# EAGLE board turnemoff (EAGLE 5.11)
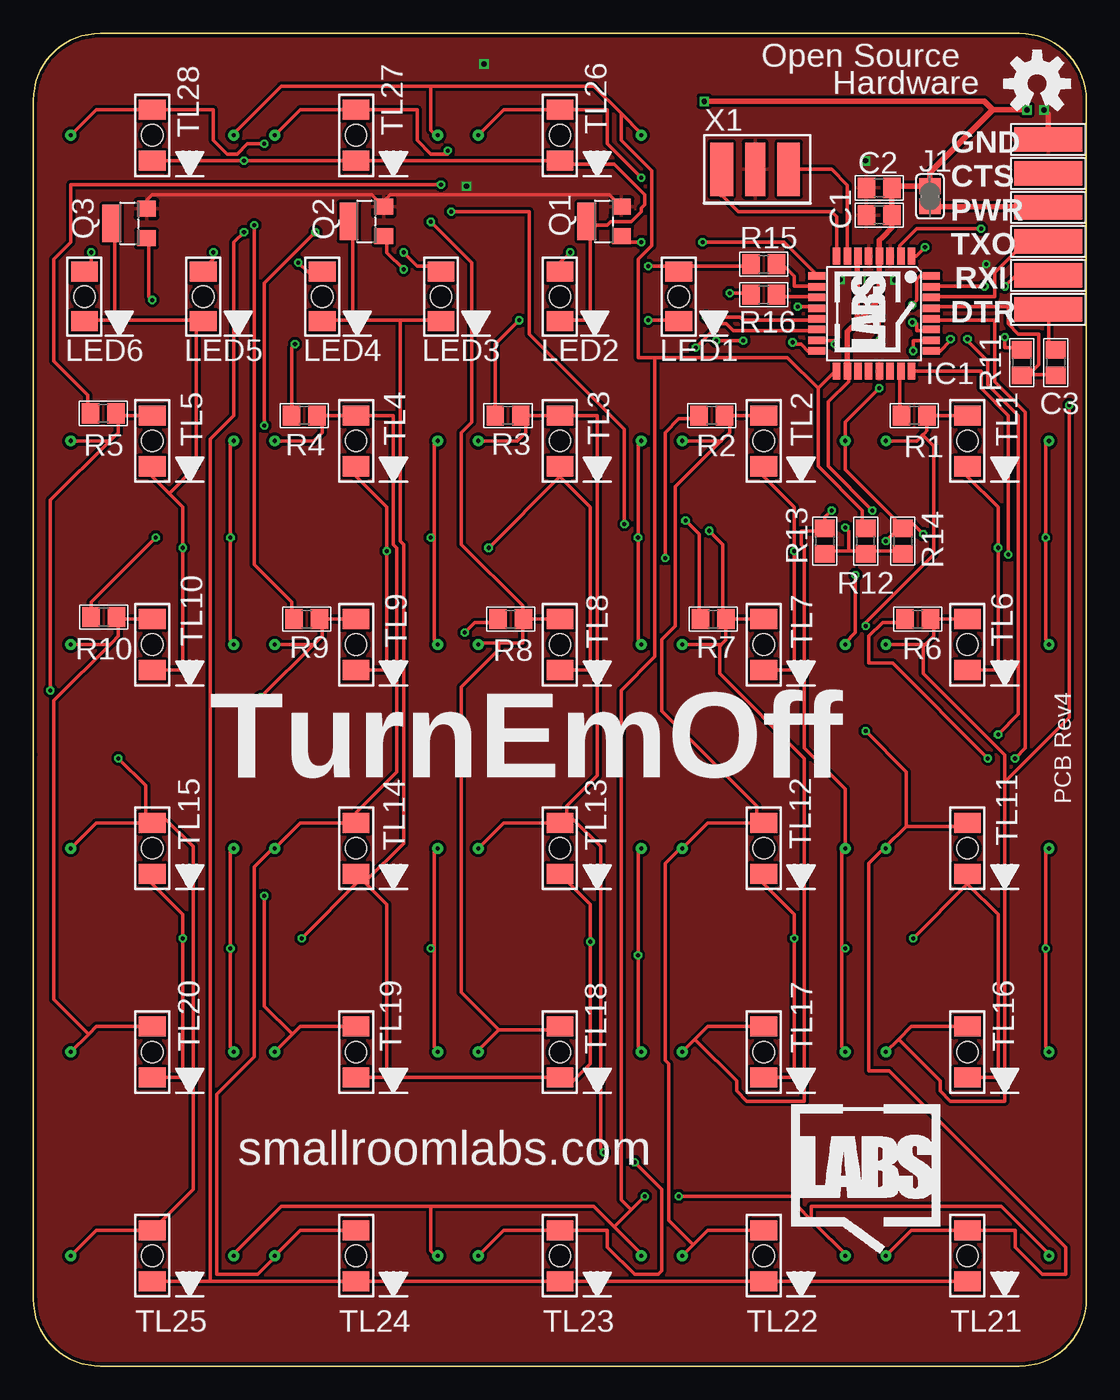
[diagram p0: board, top side]
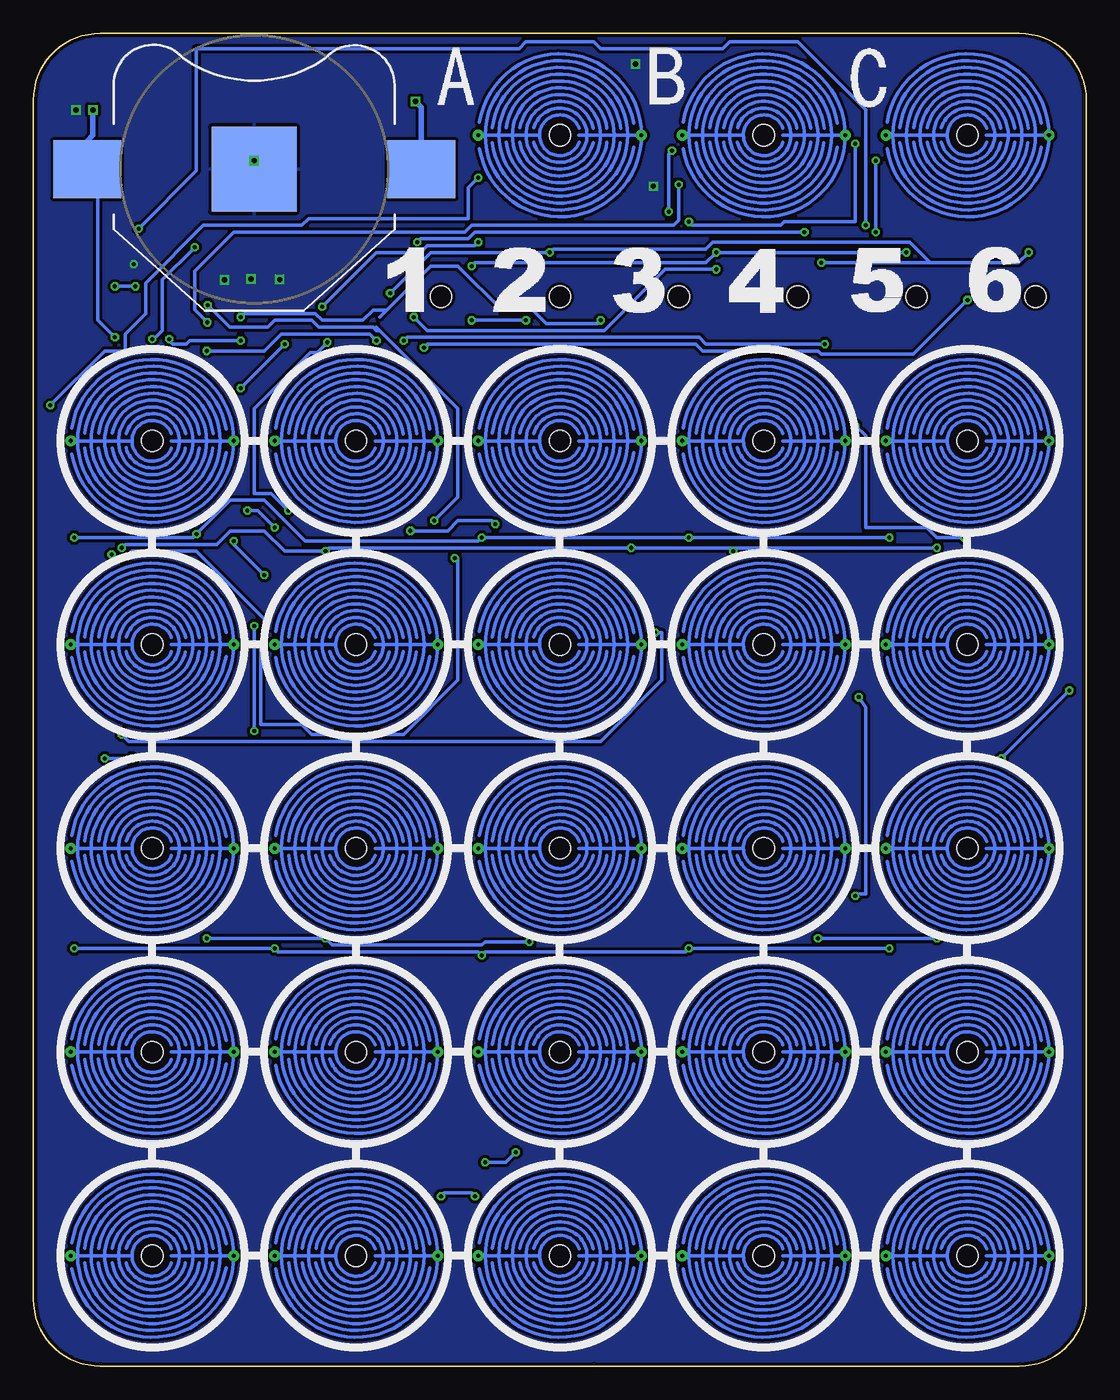
[diagram p1: board, bottom side, seen from below]

Size 78.74 x 99.69 mm. Coordinates in mm from the lower left corner, seen from the top.
Outline: 73.66,0 69.85,0
Outline: 0,45.72 0,94.69 arc-90 5,99.69 39.37,99.69 73.74,99.69 arc-90 78.74,94.69 78.74,52.7 78.74,5 arc-90 73.74,0 36.83,0 5,0 arc-90 0,5 0,45.72
Copper layers (1*16): Top 0.035mm / dielectric 1.5mm / Bottom 0.035mm
Design rules "Fusion_eagle_rule_v1.1": minimum track width 6mil, minimum drill 12mil, track to track 6mil, track to pad 6mil, pad to pad 6mil, via to via 6mil, smd to smd 0mil, copper to edge 10mil, drill to drill 10mil, minimum pad ring 10mil, minimum via ring 6mil, stop-mask expansion 2mil, vias tented up to drill 100mil, thermal gap 10mil
Net classes: 0 default: width 0.254 mm, clearance 0.229 mm; 1 pwr: width 0.254 mm, clearance 0.229 mm
vRestrict: area 52.6,80.5 to 71.9,99.8; area 33,78.8 to 33.9,78.8; area 15.2,78.8 to 16.1,78.9; area 6.3,78.8 to 7.1,78.9; area 32.7,78.8 to 34.2,78.9; area 14.9,78.9 to 16.4,78.9; area 6.1,78.9 to 7.4,78.9; area 49.6,78.9 to 50.9,78.9; area 40.4,78.9 to 44.4,78.9; area 32.6,78.9 to 34.4,78.9; area 23.3,78.8 to 24.4,78.8; area 14.8,78.9 to 16.6,79; 710 more areas

## Footprints (pad centres in the part's own frame; a part is rotated, then mirrored left to right if it is on the bottom)
0805 = smd 1.3 x 1.5: 1 -0.95,0; 2 0.95,0
5-1,8 = smd 1.829 x 5.08: 1 0,0
TQFP32-08 = smd 1.27 x 0.559: 1 -4.293,2.8; 2 -4.293,2; 3 -4.293,1.2; 4 -4.293,0.4; 5 -4.293,-0.4; 6 -4.293,-1.2; 7 -4.293,-2; 8 -4.293,-2.8; 17 4.293,-2.8; 18 4.293,-2; 19 4.293,-1.2; 20 4.293,-0.4; 21 4.293,0.4; 22 4.293,1.2; 23 4.293,2; 24 4.293,2.8 | smd 0.559 x 1.27: 9 -2.8,-4.293; 10 -2,-4.293; 11 -1.2,-4.293; 12 -0.4,-4.293; 13 0.4,-4.293; 14 1.2,-4.293; 15 2,-4.293; 16 2.8,-4.293; 25 2.8,4.293; 26 2,4.293; 27 1.2,4.293; 28 0.4,4.293; 29 -0.4,4.293; 30 -1.2,4.293; 31 -2,4.293; 32 -2.8,4.293
SJ = smd 1.168 x 1.6: 1 -0.762,0; 2 0.762,0
HO-LED = smd 1.5 x 2: ANODE -1.854,0; CATHODE 1.854,0 | hole 1.6: 0,0
SOT23-W = smd 1.2 x 1.4: 1 -1.1,-1.3; 2 1.1,-1.3 | smd 2.8 x 1.4: 3 0,1.3
TOUCH_SMD3 = smd 2 x 1.5 bottom: ANODE 0,-1.905; CATHODE 0,1.905 | drill 0.305 pad 0.76 round: TOUCH1 -6.096,0; TOUCH2 6.096,0 | hole 1.6: 0,0
BATTCON-20MM-SMD-SMALLPAD = smd 6.35 x 6.35: NEG 0,0 | smd 5.08 x 4.318: POS1 -12.5,0; POS2 12.5,0
RESONATOR-WIDE-SMD = smd 1.7 x 4: 1 -2.5,0; 3 2.5,0 | smd 1.5 x 4: 2 0,0

## Placement (x,y rotation side)
C1  [0805]  63.25,86.11 180 top
C2  [0805]  63.25,88.14 180 top
C3  [0805]  76.45,75.06 270 top
CTS  WIREPADSMD5-1,8  [5-1,8]  75.88,89.22 270 top
DTR  WIREPADSMD5-1,8  [5-1,8]  75.88,79.06 270 top
GND  WIREPADSMD5-1,8  [5-1,8]  75.88,91.76 270 top
IC1  ATMEGA168  [TQFP32-08]  62.87,78.74 270 top
J1  [SJ]  67.05,87.5 90 top
LED1  LED  [HO-LED]  48.26,80.01 270 top
LED2  LED  [HO-LED]  39.37,80.01 270 top
LED3  LED  [HO-LED]  30.48,80.01 270 top
LED4  LED  [HO-LED]  21.59,80.01 270 top
LED5  LED  [HO-LED]  12.7,80.01 270 top
LED6  LED  [HO-LED]  3.81,80.01 270 top
PWR  WIREPADSMD5-1,8  [5-1,8]  75.88,86.68 270 top
Q1  [SOT23-W]  42.67,85.62 90 top
Q2  [SOT23-W]  24.89,85.62 90 top
Q3  [SOT23-W]  7.16,85.47 90 top
R1  [0805]  65.87,71.11 180 top
R2  [0805]  50.73,71.11 180 top
R3  [0805]  35.49,71.11 180 top
R4  [0805]  20.25,71.11 180 top
R5  [0805]  5.22,71.27 180 top
R6  [0805]  66.14,55.88 180 top
R7  [0805]  50.83,55.88 180 top
R8  [0805]  35.69,55.88 180 top
R9  [0805]  20.45,55.88 180 top
R10  [0805]  5.27,56.03 180 top
R11  [0805]  73.91,75.06 90 top
R12  [0805]  62.23,61.72 90 top
R13  [0805]  59.18,61.72 90 top
R14  [0805]  65.02,61.72 90 top
R15  [0805]  54.61,82.42 0 top
R16  [0805]  54.61,80.14 0 top
RXI  WIREPADSMD5-1,8  [5-1,8]  75.88,81.6 270 top
TL1  TOUCHLED  [TOUCH_SMD3]  69.85,69.22 180 bottom
TL2  TOUCHLED  [TOUCH_SMD3]  54.61,69.22 180 bottom
TL3  TOUCHLED  [TOUCH_SMD3]  39.37,69.22 180 bottom
TL4  TOUCHLED  [TOUCH_SMD3]  24.13,69.22 180 bottom
TL5  TOUCHLED  [TOUCH_SMD3]  8.89,69.22 180 bottom
TL6  TOUCHLED  [TOUCH_SMD3]  69.85,53.98 180 bottom
TL7  TOUCHLED  [TOUCH_SMD3]  54.61,53.98 180 bottom
TL8  TOUCHLED  [TOUCH_SMD3]  39.37,53.98 180 bottom
TL9  TOUCHLED  [TOUCH_SMD3]  24.13,53.98 180 bottom
TL10  TOUCHLED  [TOUCH_SMD3]  8.89,53.98 180 bottom
TL11  TOUCHLED  [TOUCH_SMD3]  69.85,38.73 180 bottom
TL12  TOUCHLED  [TOUCH_SMD3]  54.61,38.73 180 bottom
TL13  TOUCHLED  [TOUCH_SMD3]  39.37,38.73 180 bottom
TL14  TOUCHLED  [TOUCH_SMD3]  24.13,38.73 180 bottom
TL15  TOUCHLED  [TOUCH_SMD3]  8.89,38.73 180 bottom
TL16  TOUCHLED  [TOUCH_SMD3]  69.85,23.5 180 bottom
TL17  TOUCHLED  [TOUCH_SMD3]  54.61,23.5 180 bottom
TL18  TOUCHLED  [TOUCH_SMD3]  39.37,23.5 180 bottom
TL19  TOUCHLED  [TOUCH_SMD3]  24.13,23.5 180 bottom
TL20  TOUCHLED  [TOUCH_SMD3]  8.89,23.5 180 bottom
TL21  TOUCHLED  [TOUCH_SMD3]  69.85,8.26 180 bottom
TL22  TOUCHLED  [TOUCH_SMD3]  54.61,8.26 180 bottom
TL23  TOUCHLED  [TOUCH_SMD3]  39.37,8.26 180 bottom
TL24  TOUCHLED  [TOUCH_SMD3]  24.13,8.26 180 bottom
TL25  TOUCHLED  [TOUCH_SMD3]  8.89,8.26 180 bottom
TL26  TOUCHLED  [TOUCH_SMD3]  39.37,92.08 180 bottom
TL27  TOUCHLED  [TOUCH_SMD3]  24.13,92.08 180 bottom
TL28  TOUCHLED  [TOUCH_SMD3]  8.89,92.08 180 bottom
TXO  WIREPADSMD5-1,8  [5-1,8]  75.88,84.14 270 top
U$2  [SRL-LOGO-SILK-5MM]  64.87,75.82 90 top
U$5  [SRL-LOGO-SILK-10MM]  56.68,8.42 0 top
U$10  [SRL-LOGO-STOP-5MM]  14.29,92.39 0 top
U$11  [OSHW-LOGO-M]  75.06,95.94 0 top
U$12  BATTERYCOIN20MM-SMALL  [BATTCON-20MM-SMD-SMALLPAD]  62.23,89.53 0 bottom
X1  RESONATOR-WIDE  [RESONATOR-WIDE-SMD]  53.98,89.53 180 top

## Library data of the parts
C1-C3 Q1-Q3 R1-R16 = microbuilder
CTS DTR GND PWR RXI TXO = wirepad
IC1 U$11 X1 = SparkFun
J1 = jumper
LED1-LED6 TL1-TL28 U$2 U$5 U$10 U$12 = SmallRoomLabs

## Nets
GND [pwr]: C1.2 C2.2 GND.1 IC1.3 IC1.5 IC1.21 Q1.2 Q2.2 Q3.2 U$12.NEG X1.2
LCOM1: LED5.CATHODE LED6.CATHODE Q3.3 TL1.CATHODE TL2.CATHODE TL3.CATHODE TL4.CATHODE TL5.CATHODE TL6.CATHODE TL7.CATHODE TL8.CATHODE TL9.CATHODE TL10.CATHODE
LCOM2: LED3.CATHODE LED4.CATHODE Q2.3 TL11.CATHODE TL12.CATHODE TL13.CATHODE TL14.CATHODE TL15.CATHODE TL16.CATHODE TL17.CATHODE TL18.CATHODE TL19.CATHODE TL20.CATHODE
LCOM3: LED1.CATHODE LED2.CATHODE Q1.3 TL21.CATHODE TL22.CATHODE TL23.CATHODE TL24.CATHODE TL25.CATHODE TL26.CATHODE TL27.CATHODE TL28.CATHODE
LT1: R1.1 TL1.ANODE TL1.TOUCH1 TL11.ANODE TL11.TOUCH1 TL21.ANODE TL21.TOUCH1
LT2: R2.1 TL2.ANODE TL2.TOUCH1 TL12.ANODE TL12.TOUCH1 TL22.ANODE TL22.TOUCH1
LT3: R3.1 TL3.ANODE TL3.TOUCH1 TL13.ANODE TL13.TOUCH1 TL23.ANODE TL23.TOUCH1
LT4: R4.1 TL4.ANODE TL4.TOUCH1 TL14.ANODE TL14.TOUCH1 TL24.ANODE TL24.TOUCH1
LT5: R5.1 TL5.ANODE TL5.TOUCH1 TL15.ANODE TL15.TOUCH1 TL25.ANODE TL25.TOUCH1
LT6: R6.1 TL6.ANODE TL6.TOUCH1 TL16.ANODE TL16.TOUCH1 TL26.ANODE TL26.TOUCH1
LT7: R7.1 TL7.ANODE TL7.TOUCH1 TL17.ANODE TL17.TOUCH1 TL27.ANODE TL27.TOUCH1
LT8: R8.1 TL8.ANODE TL8.TOUCH1 TL18.ANODE TL18.TOUCH1 TL28.ANODE TL28.TOUCH1
LT9: R9.1 TL9.ANODE TL9.TOUCH1 TL19.ANODE TL19.TOUCH1
LT10: R10.1 TL10.ANODE TL10.TOUCH1 TL20.ANODE TL20.TOUCH1
N$1: C3.2 IC1.29 R11.1
N$2: C3.1 DTR.1
N$3: IC1.31 RXI.1
N$5: IC1.30 TXO.1
N$8: IC1.23 R1.2
N$9: IC1.24 R2.2
N$10: IC1.25 R3.2
N$11: IC1.26 R4.2
N$12: IC1.27 R5.2
N$13: IC1.28 R6.2
N$14: IC1.32 R7.2
N$15: IC1.1 R8.2
N$16: IC1.2 R9.2
N$17: IC1.9 R10.2
N$18: IC1.10 R15.2
N$19: IC1.11 R16.2
N$20: IC1.14 Q3.1
N$21: LED1.ANODE LED3.ANODE LED5.ANODE R15.1
N$22: LED2.ANODE LED4.ANODE LED6.ANODE R16.1
N$23: IC1.12 Q1.1
N$24: IC1.13 Q2.1
PWR: J1.1 PWR.1
TCOM1: IC1.15 R14.2 TL1.TOUCH2 TL2.TOUCH2 TL3.TOUCH2 TL4.TOUCH2 TL5.TOUCH2 TL6.TOUCH2 TL7.TOUCH2 TL8.TOUCH2 TL9.TOUCH2 TL10.TOUCH2
TCOM2: IC1.16 R13.2 TL11.TOUCH2 TL12.TOUCH2 TL13.TOUCH2 TL14.TOUCH2 TL15.TOUCH2 TL16.TOUCH2 TL17.TOUCH2 TL18.TOUCH2 TL19.TOUCH2 TL20.TOUCH2
TCOM3: IC1.17 R12.2 TL21.TOUCH2 TL22.TOUCH2 TL23.TOUCH2 TL24.TOUCH2 TL25.TOUCH2 TL26.TOUCH2 TL27.TOUCH2 TL28.TOUCH2
VCC [pwr]: C1.1 C2.1 IC1.4 IC1.6 IC1.18 J1.2 R11.2 R12.1 R13.1 R14.1 U$12.POS1 U$12.POS2
XTAL1: IC1.7 X1.1
XTAL2: IC1.8 X1.3

## Tracks (layer width: path | path; a pad name or v marks a point on that pad's centre or on a via)
GND  (via drill 0.3, 0.4)
  Top 0.254: Q3.2 8.46,87.2 8.89,87.63 25.29,87.63 Q2.2 26.19,87.15 26.67,87.63 43.06,87.63 Q1.2
  Top 0.406: GND.1 75.88,93.66 v75.56,93.98
  other vias: 62.23,90.17 33.71,97.41 32.38,88.27 71.25,82.42 60.33,81.28 62.46,81.33 64.44,81.25
  pour Top: 78.74,46.99 78.74,94.61 arc90 73.66,99.69 24.13,99.69 5.08,99.69 arc90 0,94.61 0,48.26 0,5.08 arc90 5.08,0 38.73,0 73.66,0 arc90 78.74,5.08
  pour Bottom: 0,5.08 0,94.61 arc-90 5.08,99.69 73.66,99.69 arc-90 78.74,94.61 78.74,5.08 arc-90 73.66,0 5.08,0 arc-90
LCOM1  (via drill 0.3)
  Top 0.254: TL10.CATHODE 11.18,52.07 v11.18,61.21 11.18,64.26 10.16,65.28 | 10.16,65.28 8.89,66.55 TL5.CATHODE | 12.19,78.23 12.7,78.23 LED5.CATHODE 12.19,78.23 | 12.19,78.23 6.1,78.23 | 6.1,78.23 3.81,78.23 LED6.CATHODE | 6.1,78.23 6.1,85.34 Q3.3 | 10.16,65.28 12.19,67.31 12.19,78.23 | TL6.CATHODE 72.14,52.07 v72.14,61.21 72.14,64.26 69.85,66.55 TL1.CATHODE | TL7.CATHODE 56.9,52.07 v56.9,60.96 56.9,64.26 54.61,66.55 TL2.CATHODE | TL9.CATHODE 26.42,52.07 v26.42,60.96 26.42,64.26 24.13,66.55 TL4.CATHODE | TL8.CATHODE 41.66,52.07 41.66,64.26 39.37,66.55 | 39.37,66.55 TL3.CATHODE | v34.04,61.21 39.37,66.55
  Bottom 0.254: 26.67,61.21 v26.42,60.96 | 26.67,61.21 v34.04,61.21 56.64,61.21 v56.9,60.96 59.94,60.96 61.47,62.48 64.01,62.48 65.02,61.47 71.88,61.47 v72.14,61.21 | v11.18,61.21 26.67,61.21
LCOM2  (via drill 0.3)
  Top 0.254: TL17.CATHODE 56.9,21.59 v56.9,32 56.9,33.78 54.61,36.07 TL12.CATHODE | TL16.CATHODE 72.14,21.59 72.14,33.78 69.85,36.07 | 69.85,36.07 TL11.CATHODE | v65.79,32 69.85,36.07 | 27.43,78.23 30.48,78.23 LED3.CATHODE | 27.43,78.23 23.88,78.23 | 23.88,78.23 21.59,78.23 LED4.CATHODE | 23.88,78.23 23.88,85.34 23.62,85.6 Q2.3 | TL20.CATHODE 11.18,21.59 v11.18,32 11.18,33.78 8.89,36.07 TL15.CATHODE | 26.42,21.59 TL18.CATHODE 39.37,21.34 40.39,21.34 41.66,22.61 v41.66,31.75 41.66,34.54 TL13.CATHODE | 26.42,21.59 TL19.CATHODE | 24.89,36.07 26.42,34.54 26.42,21.59 | 24.38,36.58 24.89,36.07 | 24.38,36.58 TL14.CATHODE 24.38,36.58 | v20.07,32 24.38,36.32 24.38,36.58 | 27.43,78.23 27.43,61.72 27.69,61.47 27.69,39.12 24.89,36.32 24.89,36.07
  Bottom 0.254: v65.79,32 v56.9,32 56.39,31.5 45.21,31.5 44.96,31.75 v41.66,31.75 | v11.18,32 v20.07,32
LCOM3  (via drill 0.3)
  Top 0.254: 41.66,78.23 39.37,78.23 LED2.CATHODE | 41.66,85.34 41.66,78.23 | 41.66,85.34 41.4,85.6 Q1.3 41.66,85.34 | v45.97,78.23 48.26,78.23 LED1.CATHODE | 41.66,78.23 v41.91,78.23 | TL28.CATHODE v15.75,90.17 TL27.CATHODE TL26.CATHODE 39.37,89.92 43.43,89.92 45.72,87.63 45.72,86.87 45.47,86.61 45.47,86.36 44.7,85.6 43.18,85.6 42.93,85.34 41.66,85.34 | 13.21,6.35 TL24.CATHODE TL23.CATHODE TL22.CATHODE TL21.CATHODE | TL25.CATHODE 13.21,6.35 | v15.75,84.84 14.99,84.07 14.99,71.12 13.21,69.34 13.21,6.35
  Bottom 0.254: v41.91,78.23 v45.97,78.23 | v15.75,84.84 v15.75,90.17
LT1  (via drill 0.3)
  Top 0.254: TL21.TOUCH1 65.09,9.59 65.66,10.16 TL21.ANODE 73.41,10.16 73.41,8.89 75.44,6.86 77.22,6.86 77.22,8.89 64.01,22.1 62.48,22.1 62.48,37.59 63.75,38.86 | 66.48,69.66 66.04,69.22 TL1.TOUCH1 | 66.48,69.66 66.67,69.85 66.82,70 R1.1 TL1.ANODE | 63.75,38.86 65.28,40.39 | 65.28,40.39 69.85,40.39 TL11.ANODE | 63.75,38.86 TL11.TOUCH1 63.75,38.86 | v62.23,55.37 62.23,55.63 67.31,60.71 67.31,68.83 66.55,69.6 66.48,69.66 | v62.23,47.5 65.28,44.45 65.28,40.39
  Bottom 0.254: v62.23,47.5 v62.23,55.37
LT2
  Top 0.254: TL22.TOUCH1 49.34,9.08 | 49.34,9.08 49.85,9.59 50.42,10.16 TL22.ANODE | 54.1,40.64 50.42,40.64 TL12.TOUCH1 48.51,38.86 47.24,37.59 47.24,22.86 47.5,22.61 47.5,10.92 49.28,9.14 49.34,9.08 | 54.1,40.64 TL12.ANODE 54.1,40.64 | 51.56,69.34 51.44,69.22 TL2.TOUCH1 | 51.56,69.34 52.07,69.85 52.07,70.72 R2.1 TL2.ANODE | 51.56,69.34 48.01,65.79 48.01,55.37 46.99,54.36 46.99,49.02 54.1,41.91 54.1,40.64
LT3  (via drill 0.3)
  Top 0.254: TL23.TOUCH1 35.18,10.16 TL23.ANODE 42.93,10.16 42.93,8.89 44.96,6.86 46.74,6.86 46.99,7.11 46.99,13.21 v44.96,15.24 | TL13.TOUCH1 35.18,40.64 TL13.ANODE | TL3.TOUCH1 36.2,69.22 36.83,69.85 36.83,70.72 R3.1 TL3.ANODE 42.16,71.12 42.16,44.2 39.88,41.91 39.88,40.89 | 39.88,40.89 39.37,40.89 TL13.ANODE | 39.88,40.89 40.39,40.89 42.42,38.86 42.42,16.26 v42.67,16 | 39.88,40.89 TL13.ANODE
  Bottom 0.254: v44.96,15.24 43.43,15.24 v42.67,16
LT4
  Top 0.254: TL24.ANODE 19.94,10.16 TL24.TOUCH1 18.03,8.13 16.76,6.86 13.72,6.86 13.72,20.32 16.51,23.11 16.51,37.34 18.03,38.86 TL14.TOUCH1 19.94,40.64 TL14.ANODE 24.13,41.4 27.18,44.45 27.18,61.21 26.92,61.47 26.92,71.12 TL4.ANODE R4.1 21.59,70.72 21.59,69.85 20.95,69.22 TL4.TOUCH1
LT5  (via drill 0.3)
  Top 0.254: TL25.TOUCH1 4.7,10.16 TL25.ANODE 11.94,13.21 11.94,38.86 9.91,40.89 8.89,40.89 TL15.ANODE | TL15.TOUCH1 4.7,40.64 8.38,40.64 | TL15.ANODE 8.38,40.64 | TL5.ANODE 6.32,71.12 R5.1 6.35,71.09 6.35,69.85 5.84,69.34 | 5.84,69.34 5.71,69.22 TL5.TOUCH1 | 5.84,69.34 1.27,64.77 v1.27,50.55 | v6.35,45.47 8.38,43.43 8.38,40.64 | TL15.ANODE 8.38,40.64
  Bottom 0.254: v6.35,45.47 v1.27,50.55
LT6  (via drill 0.3)
  Top 0.254: TL16.TOUCH1 64.71,24.45 | 64.71,24.45 65.66,25.4 TL16.ANODE | TL6.ANODE 67.94,55.88 R6.1 67.31,55.65 67.31,54.61 66.8,54.1 | 66.8,54.1 66.67,53.98 TL6.TOUCH1 | TL26.TOUCH1 35.18,93.98 TL26.ANODE 42.93,93.98 42.93,91.44 v45.47,88.9 | 72.64,43.69 72.64,45.72 66.55,51.82 66.55,53.85 66.8,54.1 | 72.64,43.69 72.64,19.81 68.58,19.81 67.82,20.57 67.82,21.34 64.77,24.38 64.71,24.45 | v77.47,71.88 77.47,48.51 72.64,43.69
  Bottom 0.254: v45.47,88.9 46.23,88.14 46.23,85.85 58.17,85.85 58.67,85.34 66.04,85.34 70.36,81.03 70.36,78.74 71.88,77.22 71.88,75.95 73.41,75.95 v77.47,71.88
LT7  (via drill 0.3)
  Top 0.254: TL17.TOUCH1 49.47,24.45 | 49.47,24.45 50.42,25.4 TL17.ANODE | R7.1 TL7.ANODE | R7.1 51.78,54.32 51.56,54.1 | 51.56,54.1 51.44,53.98 TL7.TOUCH1 | TL27.TOUCH1 19.94,93.98 TL27.ANODE 28.7,93.98 28.7,91.69 29.72,90.68 30.99,90.68 v30.99,90.93 | 51.56,54.1 51.31,53.85 51.31,51.82 57.66,45.47 57.66,19.81 53.34,19.81 52.58,20.57 52.58,21.34 49.53,24.38 49.47,24.45 | v31.24,86.36 37.08,86.36 37.08,77.22 44.2,70.1 v44.2,62.99 | v50.55,62.48 51.56,61.47 51.56,55.88 R7.1
  Bottom 0.254: v31.24,86.36 31.24,90.68 v30.99,90.93 | v50.55,62.48 47.75,62.48 46.99,63.25 44.45,63.25 v44.2,62.99
LT8  (via drill 0.3)
  Top 0.254: TL28.TOUCH1 4.7,93.98 TL28.ANODE 13.46,93.98 13.46,91.69 14.48,90.68 15.24,90.68 16,91.44 v17.27,91.44 | 34.8,25.15 33.27,23.62 TL18.TOUCH1 | 34.8,25.15 39.37,25.15 TL18.ANODE | TL8.ANODE 36.83,55.88 R8.1 | 34.8,54.1 36.58,54.1 36.58,55.63 R8.1 | 34.8,54.1 33.27,54.1 TL8.TOUCH1 | 34.8,25.15 32,27.94 32,50.8 34.8,53.59 34.8,54.1 | v29.72,85.6 32.77,82.55 32.77,70.61 32,69.85 32,61.47 36.58,56.9 36.58,55.88 R8.1
  Bottom 0.254: v17.27,91.44 17.27,85.6 22.61,85.6 22.86,85.34 29.46,85.34 v29.72,85.6
LT9  (via drill 0.3)
  Top 0.254: TL19.TOUCH1 19.37,24.83 | 19.37,24.83 19.94,25.4 TL19.ANODE | TL9.ANODE R9.1 21.59,55.69 21.59,54.61 21.08,54.1 | 21.08,54.1 20.95,53.98 TL9.TOUCH1 | v17.27,35.18 17.27,26.92 19.3,24.89 19.37,24.83 | v17.02,50.04 21.08,54.1
  Bottom 0.254: 17.27,35.31 v17.27,35.18 17.27,35.31 | v17.02,50.04 16.48,49.28 16.48,35.31 17.27,35.31
LT10
  Top 0.254: TL20.TOUCH1 4.13,24.83 | 4.13,24.83 4.7,25.4 TL20.ANODE | TL10.ANODE 6.37,55.88 R10.1 6.35,55.9 6.35,54.61 5.84,54.1 | 5.84,54.1 5.71,53.98 TL10.TOUCH1 | 5.84,54.1 1.52,49.78 1.52,27.43 4.06,24.89 4.13,24.83
N$1
  Top 0.254: 74.42,74.17 75.18,74.93 75.18,77.22 73.66,77.22 72.9,77.98 72.9,79.25 67.31,79.25 | 74.42,74.17 73.91,74.17 R11.1 74.42,74.17 | 67.31,79.25 IC1.29 67.31,79.25 | 74.42,74.17 76.45,74.17 C3.2
N$2
  Top 0.254: C3.1 76.45,76.2 75.95,76.71 75.95,78.99 DTR.1
N$3  (via drill 0.3)
  Top 0.254: v71.12,80.77 67.31,80.77 IC1.31 | v72.64,80.77 73.41,81.53 75.69,81.53 RXI.1
  Bottom 0.254: v71.12,80.77 v72.64,80.77
N$5
  Top 0.254: IC1.30 67.31,80.01 71.88,80.01 71.88,81.79 74.17,84.07 75.69,84.07 TXO.1
N$8
  Top 0.254: IC1.23 64.77,74.42 64.77,71.12 R1.2
N$9  (via drill 0.3)
  Top 0.254: v72.9,60.71 72.9,71.12 70.87,73.15 70.87,74.42 65.79,74.42 IC1.24 | v47.24,60.45 47.24,69.85 48.26,70.87 49.53,70.87 R2.2
  Bottom 0.254: v72.9,60.71 72.64,60.45 71.88,60.45 71.37,60.96 66.55,60.96 61.47,55.88 61.47,54.36 61.72,54.1 61.72,48.01 58.67,48.01 57.91,47.24 51.05,47.24 46.99,51.31 46.99,60.45 v47.24,60.45
N$10  (via drill 0.3)
  Top 0.254: v36.32,78.23 34.54,76.45 R3.2 | v63.25,76.71 63.25,77.98 v63.25,78.49 | 67.31,75.95 IC1.25 67.31,75.95 | 67.31,75.95 67.82,75.95 68.58,76.71 v68.58,76.83
  Bottom 0.254: 52.32,78.99 49.02,82.3 46.99,82.3 43.69,78.99 41.4,78.99 40.39,77.98 36.58,77.98 v36.32,78.23 | 52.32,78.99 52.83,78.49 | v63.25,78.49 62.99,78.74 57.66,78.74 57.15,78.23 54.1,78.23 53.34,78.99 52.32,78.99 | v63.25,76.71 67.06,76.71 67.31,76.45 68.33,76.45 68.58,76.71 v68.58,76.83
N$11  (via drill 0.3)
  Top 0.254: v65.79,75.95 65.79,76.71 67.06,76.71 IC1.26 | v51.05,76.71 v53.09,76.71 | v19.56,76.45 19.3,76.2 R4.2
  Bottom 0.254: v65.79,75.95 61.47,75.95 60.2,77.22 53.59,77.22 v53.09,76.71 | v51.05,76.71 50.8,76.96 28.96,76.96 28.45,76.45 v19.56,76.45
N$12  (via drill 0.3)
  Top 0.254: v30.48,88.39 2.79,88.39 2.79,84.07 1.52,82.8 1.52,75.18 4.06,72.64 4.06,71.37 R5.2 | 67.06,77.47 IC1.27 67.06,77.47 | 67.06,77.47 66.04,77.47 66.04,77.98 65.79,78.23 v65.73,78.08
  Bottom 0.254: v30.48,88.39 30.48,85.72 30.86,85.34 35.81,85.34 45.97,85.34 46.48,84.84 59.18,84.84 63.5,84.84 63.75,84.84 66.67,81.92 66.67,79.02 v65.73,78.08
N$13  (via drill 0.3)
  Top 0.254: v73.41,45.47 74.17,46.23 74.17,71.37 71.88,73.66 71.88,78.23 67.31,78.23 | v71.37,45.47 64.26,52.58 62.48,52.58 62.48,54.61 63.5,55.63 65.02,55.63 R6.2 | 67.31,78.23 IC1.28 67.31,78.23
  Bottom 0.254: v71.37,45.47 v73.41,45.47
N$14  (via drill 0.3)
  Top 0.254: v48.77,63.25 49.78,62.23 49.78,55.88 R7.2 | IC1.32 67.06,81.53 66.29,81.53 66.04,81.28 66.04,79.76 65.79,79.5 v65.71,79.38
  Bottom 0.254: 52.83,77.47 46.99,71.63 46.99,65.02 v48.77,63.25 | 52.83,77.47 53.09,77.72 | 52.83,77.47 53.09,77.47 53.34,77.72 57.4,77.72 57.91,78.23 60.71,78.23 61.21,77.72 64.06,77.72 v65.71,79.38
N$15  (via drill 0.3)
  Top 0.254: v72.14,47.24 73.66,48.77 73.66,71.12 71.37,73.41 71.37,75.18 69.85,76.71 v69.85,76.83 | v32.26,54.86 33.02,55.63 34.54,55.63 R8.2 | 65.53,82.8 IC1.1 66.02,83.03 v66.67,83.69
  Bottom 0.254: v72.14,47.24 71.63,46.74 36.32,46.74 31.75,51.31 31.75,54.86 v32.26,54.86 | v66.67,83.69 66.8,83.57 69.09,81.28 69.09,77.47 69.6,76.96 69.85,76.96 v69.85,76.83
N$16  (via drill 0.3)
  Top 0.254: v70.87,85.09 66.04,85.09 64.77,83.82 64.77,83.06 IC1.2 | v16.51,85.34 16.51,59.94 19.3,57.15 19.3,55.88 R9.2
  Bottom 0.254: v70.87,85.09 66.55,89.41 66.55,98.55 42.42,98.55 41.91,99.06 36.83,99.06 36.32,98.55 27.18,98.55 26.67,99.06 21.59,99.06 16.51,93.98 v16.51,85.34
N$17  (via drill 0.3)
  Top 0.254: v50.04,84.07 56.13,84.07 58.42,81.79 IC1.9 | v21.08,84.84 17.27,81.03 v17.27,70.36 | v9.14,61.98 4.32,57.15 4.32,56.13 R10.2
  Bottom 0.254: v50.04,84.07 49.78,84.33 46.23,84.33 45.72,84.84 v21.08,84.84 | v17.27,70.36 16.51,69.6 16.51,62.74 11.94,62.74 11.18,61.98 v9.14,61.98
N$18
  Top 0.254: IC1.10 58.42,80.77 56.9,80.77 56.9,81.53 56.13,82.3 55.63,82.3 R15.2
N$19
  Top 0.254: IC1.11 58.42,80.01 55.63,80.01 R16.2
N$20  (via drill 0.3)
  Top 0.254: v49.53,76.2 50.8,77.47 50.8,77.98 51.82,77.98 52.32,77.47 58.42,77.47 IC1.14 | v8.89,79.76 8.64,80.01 8.64,84.33 Q3.1
  Bottom 0.254: v49.53,76.2 49.28,76.45 29.21,76.45 28.7,75.95 20.07,75.95 19.81,75.69 12.95,75.69 v8.89,79.76
N$21  (via drill 0.3)
  Top 0.254: 48.26,82.3 53.59,82.3 R15.1 | 48.26,82.3 48.26,82.04 LED1.ANODE 48.26,82.3 | v13.46,83.31 13.46,82.8 12.7,82.04 LED5.ANODE | v27.69,83.31 28.7,82.3 30.48,82.3 30.48,82.04 LED3.ANODE | v45.97,82.3 48.26,82.3
  Bottom 0.254: v13.46,83.31 v27.69,83.31 28.45,82.55 45.72,82.55 v45.97,82.3
N$22  (via drill 0.3)
  Top 0.254: v52.07,80.26 53.59,80.26 R16.1 | v40.13,83.31 39.37,82.55 39.37,82.04 LED2.ANODE | v4.32,83.31 4.32,82.55 3.81,82.04 LED6.ANODE | v19.81,82.55 20.57,81.79 21.59,81.79 LED4.ANODE
  Bottom 0.254: v52.07,80.26 49.02,83.31 v40.13,83.31 39.88,83.57 28.45,83.57 27.94,84.07 13.21,84.07 11.68,82.55 | v4.32,83.31 5.08,82.55 11.68,82.55 | 11.68,82.55 v19.81,82.55
N$23  (via drill 0.3)
  Top 0.254: v57.15,79.25 58.42,79.25 IC1.12 | v45.47,84.07 44.2,84.07 44.2,84.33 Q1.1
  Bottom 0.254: v57.15,79.25 53.09,83.31 49.78,83.31 49.28,83.82 45.72,83.82 v45.47,84.07
N$24  (via drill 0.3)
  Top 0.254: v50.29,78.49 52.83,78.49 53.09,78.23 58.42,78.23 IC1.13 | v27.69,82.04 26.42,83.31 26.42,84.33 Q2.1
  Bottom 0.254: v50.29,78.49 49.28,77.47 36.07,77.47 31.5,82.04 v27.69,82.04
PWR
  Top 0.406: J1.1 75.82,86.74 PWR.1
TCOM1  (via drill 0.3)
  Top 0.254: TL6.TOUCH2 75.95,54.1 75.69,54.36 v75.69,61.98 75.69,69.09 75.95,69.34 TL1.TOUCH2 | v59.94,76.45 59.94,76.71 58.67,76.71 IC1.15 | v63.25,73.15 60.71,70.61 60.71,69.34 TL2.TOUCH2 60.71,69.09 60.71,67.06 64.77,62.99 | 64.77,62.99 65.02,62.74 R14.2 | v61.47,59.18 61.47,54.86 60.71,54.1 TL7.TOUCH2 | v63.75,61.72 64.77,62.74 64.77,62.99 | 64.77,62.99 R14.2 | v66.55,62.23 65.79,62.99 64.77,62.99 | 64.77,62.99 R14.2 | TL8.TOUCH2 45.47,54.1 45.21,54.36 v45.21,61.98 45.21,69.09 45.47,69.34 TL3.TOUCH2 | TL10.TOUCH2 14.99,54.1 14.73,54.36 v14.73,61.98 14.73,69.09 14.99,69.34 TL5.TOUCH2 | 29.97,61.98 29.97,69.09 30.23,69.34 TL4.TOUCH2 | 29.97,61.98 29.97,54.36 30.23,54.1 TL9.TOUCH2 | v29.72,61.98 29.97,61.98
  Bottom 0.254: v63.25,73.15 v59.94,76.45 | v61.47,59.18 63.75,61.47 v63.75,61.72 | v75.69,61.98 66.8,61.98 v66.55,62.23 64.01,64.77 61.47,64.77 58.42,61.72 45.47,61.72 v45.21,61.98 v29.72,61.98 v14.73,61.98
TCOM2  (via drill 0.3)
  Top 0.254: TL18.TOUCH2 45.47,23.62 45.21,23.88 v45.21,30.73 45.21,38.61 45.47,38.86 TL13.TOUCH2 | TL20.TOUCH2 14.99,23.62 14.73,23.88 v14.73,31.24 14.73,38.61 14.99,38.86 TL15.TOUCH2 | 29.97,31.24 29.97,38.61 30.23,38.86 TL14.TOUCH2 | 29.97,31.24 29.97,23.88 30.23,23.62 TL19.TOUCH2 | v29.72,31.24 29.97,31.24 | TL16.TOUCH2 75.95,23.62 75.69,23.88 v75.69,31.24 75.69,38.61 75.95,38.86 TL11.TOUCH2 | v59.69,64.01 59.18,63.5 59.18,62.74 R13.2 59.18,62.48 57.4,62.48 57.4,61.47 57.66,61.21 57.66,46.23 60.71,43.18 60.71,38.86 | 60.45,31.24 60.45,38.61 60.71,38.86 | 60.45,31.24 60.45,23.88 60.71,23.62 TL17.TOUCH2 | 60.71,38.86 TL12.TOUCH2 60.71,38.86 | v60.71,31.24 60.45,31.24 | v56.77,76.58 56.9,76.45 57.4,76.45 57.91,75.95 58.42,75.95 IC1.16
  Bottom 0.254: v14.73,31.24 v29.72,31.24 29.97,30.99 44.96,30.99 v45.21,30.73 45.47,30.99 60.45,30.99 v60.71,31.24 v75.69,31.24 | v59.69,64.01 60.96,65.28 62.23,65.28 62.23,71.63 58.04,75.82 57.53,75.82 56.9,76.45 v56.77,76.58
TCOM3  (via drill 0.3)
  Top 0.254: 29.72,11.94 18.54,11.94 14.99,8.38 TL25.TOUCH2 | 29.72,11.94 29.72,8.64 30.23,8.13 TL24.TOUCH2 | 43.43,10.41 41.91,11.94 29.72,11.94 | 43.43,10.41 44.45,9.4 45.47,8.38 TL23.TOUCH2 | 58.17,10.92 57.15,11.94 57.15,12.7 v48.26,12.7 | 58.17,10.92 59.44,9.65 59.69,9.4 60.71,8.38 TL22.TOUCH2 | 75.95,8.38 TL21.TOUCH2 75.95,8.38 | 58.67,73.15 59.94,74.42 IC1.17 | 58.67,73.15 58.67,67.31 61.98,64.01 61.98,62.99 62.23,62.74 R12.2 | 29.72,95.76 18.54,95.76 14.99,92.2 TL28.TOUCH2 | 29.72,95.76 29.72,92.46 30.23,91.95 TL27.TOUCH2 | 43.94,93.73 41.91,95.76 29.72,95.76 | 43.94,93.73 45.47,92.2 TL26.TOUCH2 | 58.67,73.15 56.39,75.44 46.48,75.44 | 46.48,75.44 45.21,75.44 45.21,82.8 46.23,83.82 46.23,89.41 43.94,91.69 43.94,93.73 | 46.48,75.44 46.48,53.09 43.94,50.55 43.94,16.51 43.94,12.45 44.7,11.68 | 75.95,8.38 72.39,11.94 58.17,11.94 58.17,10.92 | 43.43,10.41 44.7,11.68 | 44.7,11.68 v45.72,12.7
  Bottom 0.254: v48.26,12.7 48.01,12.95 45.97,12.95 v45.72,12.7
VCC  (via drill 0.3, 0.4)
  Top 0.254: 60.96,60.96 62.23,60.96 | 60.96,60.96 59.18,60.96 R13.1 | 62.23,60.96 R12.1 62.23,60.96 | 62.23,60.96 65.02,60.96 R14.1 | v72.64,76.96 72.64,76.2 73.91,76.2 R11.2 | 60.96,60.96 60.96,62.48 v60.71,62.74 | v62.74,64.01 59.44,67.31 59.44,72.14 60.96,73.66 60.96,74.42 IC1.18
  Top 0.406: 71.75,93.98 67.05,89.27 J1.2 64.32,88.27 C2.1 C1.1 64.2,85.15 63.5,84.45 63.27,84.22 IC1.4 63.27,79.78 61.59,78.11 | 71.75,93.98 v74.3,93.98 | IC1.18 60.87,77.38 61.59,78.11 | 61.59,78.11 61.59,82.96 IC1.6 | 71.75,93.98 71.12,94.61 v50.16,94.61
  Bottom 0.254: v72.64,76.96 73.91,78.23 73.91,89.41 74.68,89.41 U$12.POS1 | v60.71,62.74 61.98,64.01 v62.74,64.01
  Bottom 0.406: U$12.POS1 74.73,91.64 74.3,92.08 v74.3,93.98 | U$12.POS2 49.73,94.18 v50.16,94.61
XTAL1
  Top 0.254: IC1.7 60.87,88.36 59.69,89.53 X1.1
XTAL2
  Top 0.254: IC1.8 60.06,85.98 59.69,86.36 52.7,86.36 51.44,87.63
  Top 0.406: 51.44,87.63 51.44,89.5 X1.3

## Text on the board
tPlace: Open Source | Hardware | TurnEmOff | PCB Rev4 | smallroomlabs.com
tNames: X1